# Altium PCB 388D_Control_v1_PCB1.PcbDoc (part 6 of 7)
Units mil, origin at the board's own origin, x right, y up, seen from the top; angles counter-clockwise.
Board outline 3431 x 3800 mil, 6 copper layers (Top Layer, Singal Layer 2, Signal layer 3, Signal Layer 4, Signal Layer 5, Bottom Layer), stack 32.7 mil thick; 270 components, 383 nets, 1462 pads, 899 vias.
Unrouted connection lines stored in the file: 19.
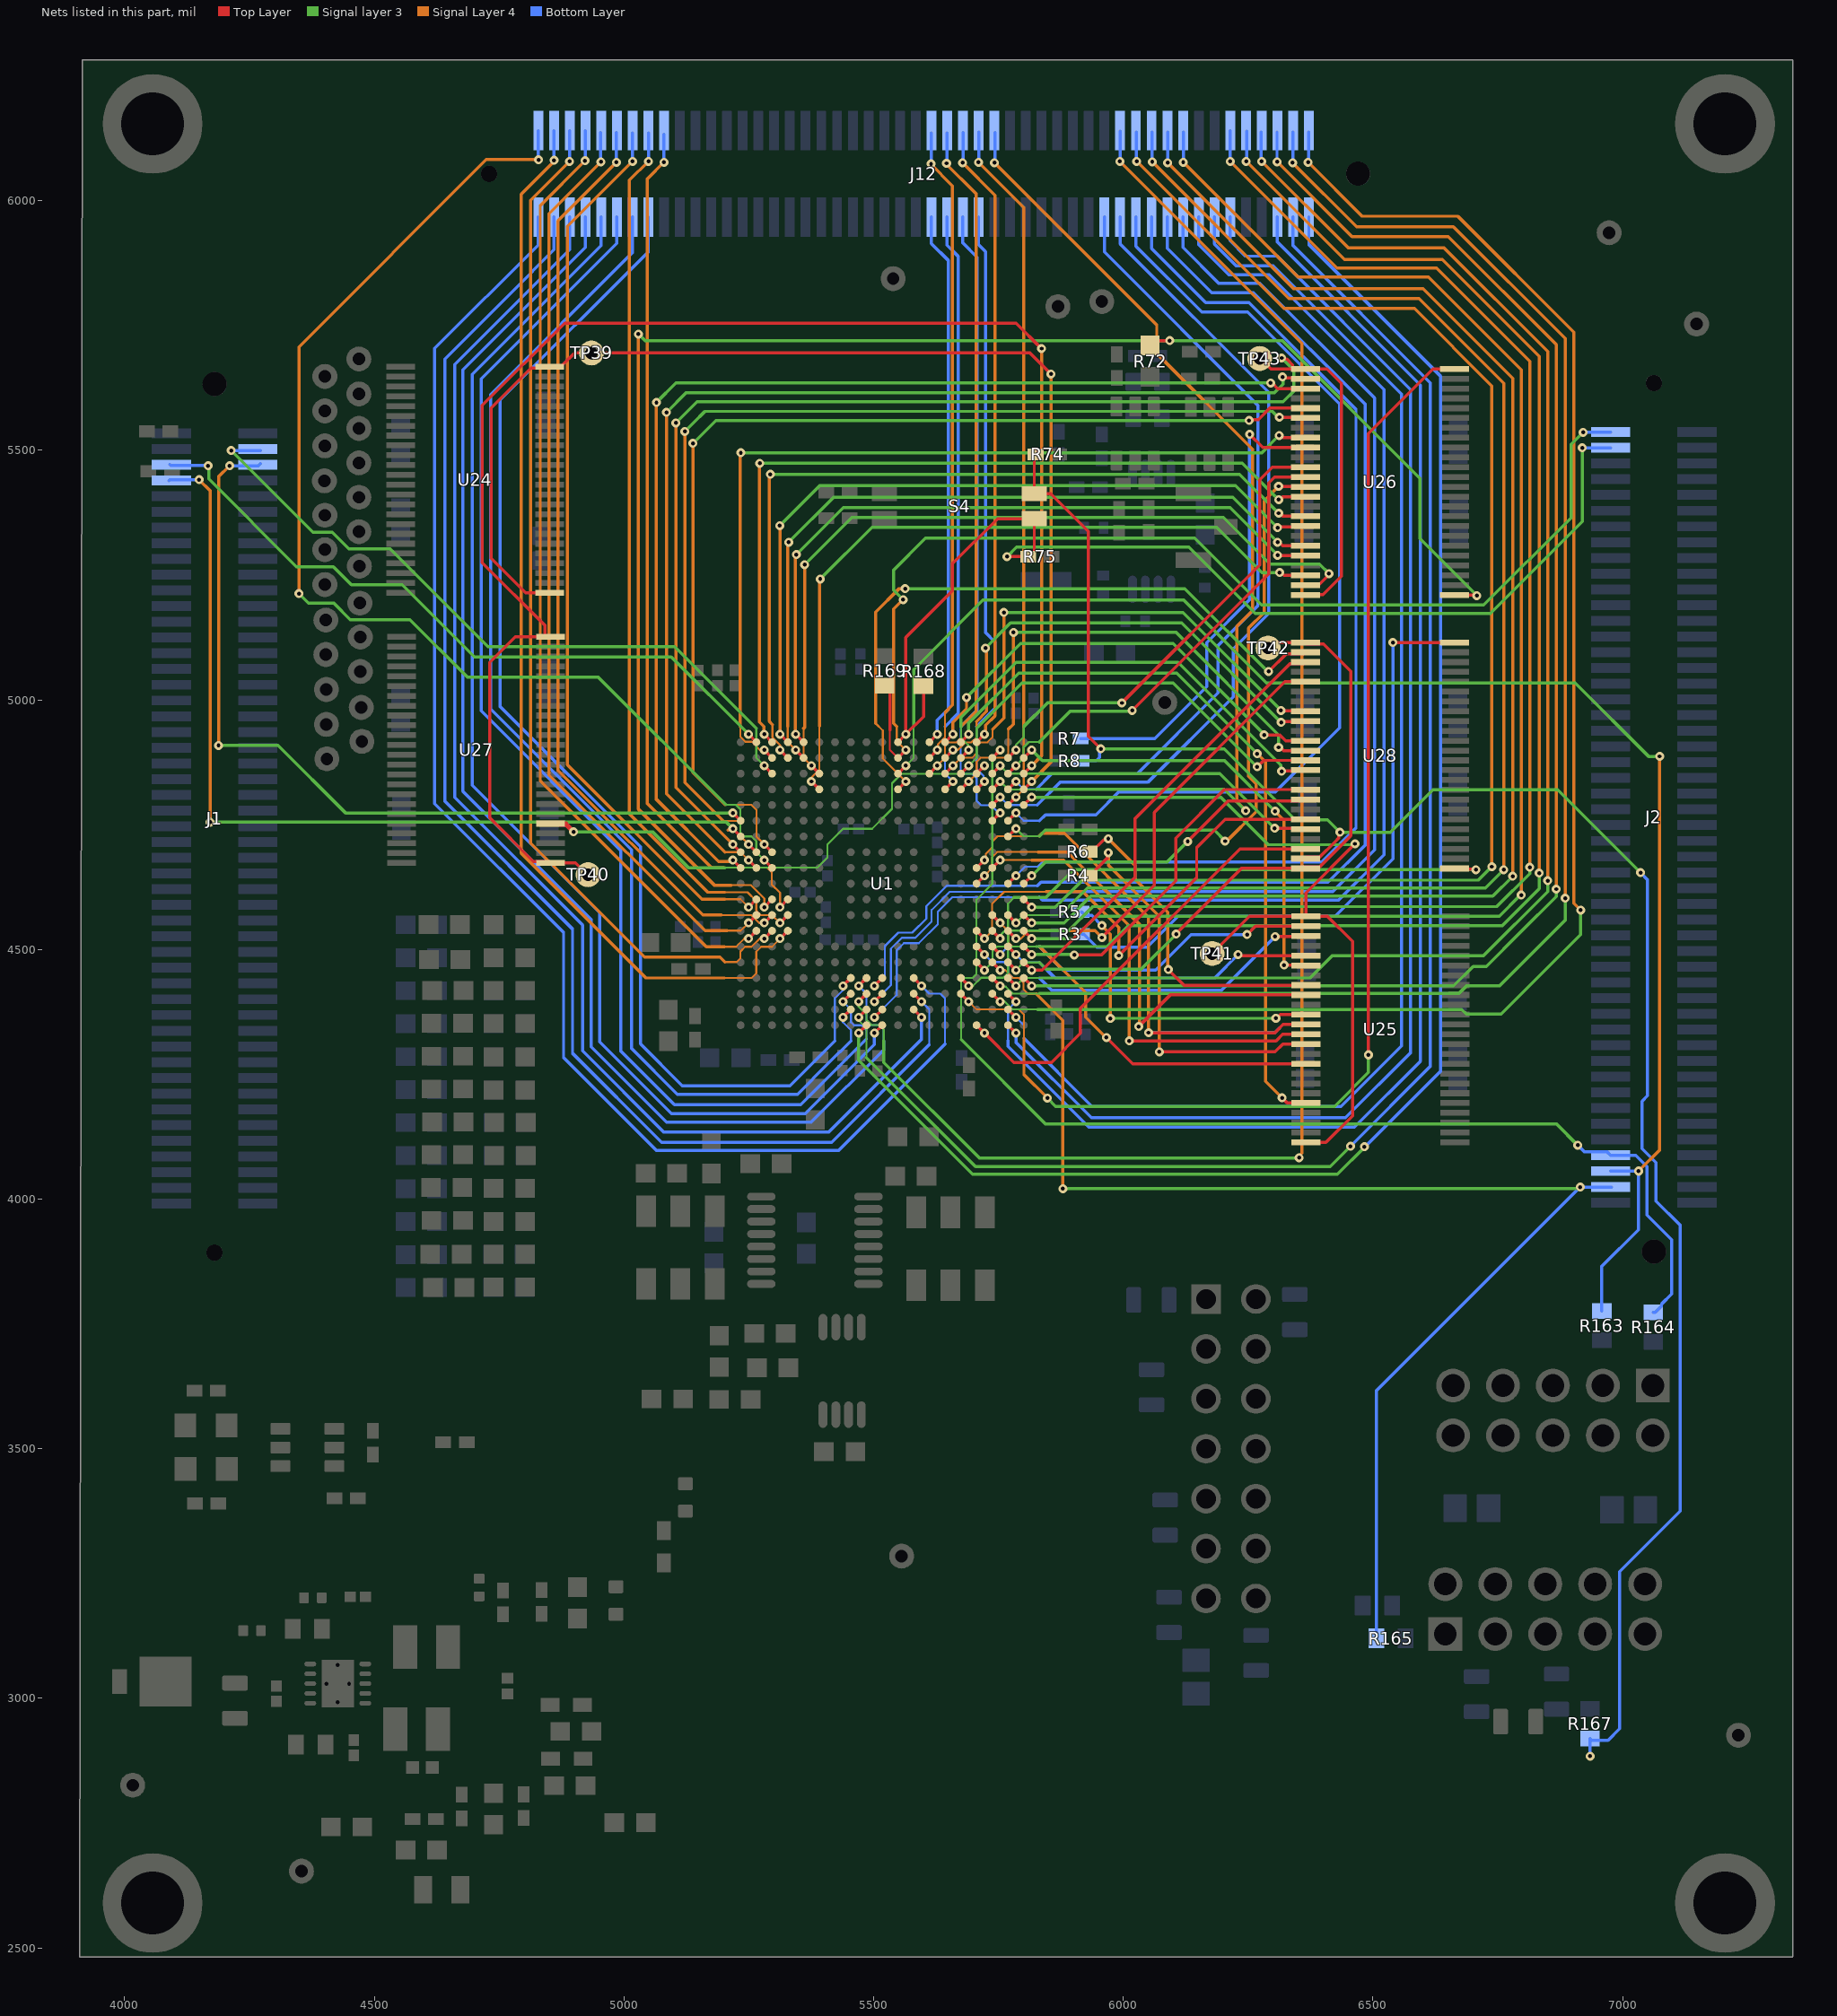
[diagram p8: the nets of this part, all layers, seen from the top]

## Via types
v1: diameter 18, hole 8, Top Layer to Bottom Layer, tented both sides, 898 vias
v2: diameter 18/18/18/18/18/18 (per signal layer), hole 8, Top Layer to Bottom Layer, tented both sides, 1 vias

## Nets (pads, with @x,y where several pads share a name; then routed paths per layer and width w, separated by ;. In a path a pad name is that pad's centre, name@x,y a point inside that pad or via, vN(x,y) a via of type N, cw(c..) or ccw(c..) an arc to the next point about the centre after c; other vN are vias at no path point) (continued)
MCU_GPIO41: J12.2 U1.U17 | length 3207.6
  Top Layer w6.25: U1.U17@5737.65,4411.52 v1(5753.4,4395.77)
  Signal layer 3 w4: v1(5753.4,4395.77) 5762.23,4395.77 5777.9,4380.1 5828.69,4380.1
  Signal layer 3 w6.25: 5828.69,4380.1 6677.9,4380.1 6687,4371 6757,4371 6916,4530 v1(6916,4579)
  Signal Layer 4 w6.25: v1(6370,6077) 6478,5969 6670,5969 6902,5737 6902,4593 v1(6916,4579)
  Bottom Layer w6.25: v1(6370,6077) 6370.83,6077.83 J12.2@6370.83,6137.61
MCU_GPIO42: TP39.1 U1.D19 U24.25 U24.48 | length 2485.7
  Top Layer w6.25: U24.25@4850.99,5214.59 4803.41,5214.59 4734,5284 4734,5585 4813.57,5664.57 4848.21,5664.57 U24.48@4850.99,5667.35 4874.12,5667.35 4876.9,5670.13 4876.9,5670.9 4901,5695 TP39.1@4935,5695 5813,5695 v1(5855,5653) ; U1.D19@5800.64,4820.97 v1(5816.39,4836.71)
  Signal Layer 4 w6.25: v1(5816.39,4836.71) 5855,4875.32 v1(5855,5653)
MCU_GPIO43: TP40.1 U1.C19 U27.25 U27.48 | length 3288.4
  Top Layer w6.25: U27.48@4841.36,5126.3 4782.3,5126.3 4731,5075 4731,4764 4818.67,4676.33 4850.2,4676.33 U27.25@4852.98,4673.54 4902.93,4673.55 4926.48,4650 TP40.1@4928,4650 ; U27.48@4852.98,5126.3 4844.14,5126.3 4841.36,5129.08 4841.36,5149.64 4716,5275 4716,5590 4881,5755 5784.97,5755 v1(5836.11,5703.86) ; U1.C19@5800.64,4852.46 v1(5816.39,4868.21)
  Signal layer 3 w6.25: v1(5836.11,5703.86) v1@5836.25,5704
  Signal Layer 4 w6.25: v1(5816.39,4868.21) 5836.11,4887.93 v1(5836.11,5703.86)
MCU_GPIO44: J12.21 U1.K18 | length 2187.1
  Top Layer w6.25: U1.K18@5769.15,4631.99 v1(5784.89,4647.74)
  Bottom Layer w4: v1(5784.89,4647.74) 5802.89,4665.74 5829.74,4665.74
  Bottom Layer w6.25: 5829.74,4665.74 5839,4675 6397,4675 6466,4744 6466,5582 6252,5796 6165,5796 6056.69,5904.31 J12.21@6056.69,5967.39
MCU_GPIO45: U1.K19 U28.41 | length 633.9
  Top Layer w6.25: U1.K19@5800.64,4631.99 v1(5816.39,4647.74) ; v1(6129,4716.5) 6168.62,4756.12 6210.5,4798 6362.67,4798 U28.41@6364.87,4800.2
  Signal layer 3 w6.25: v1(5816.39,4647.74) 5843.65,4675 6087.5,4675 v1(6129,4716.5)
MCU_GPIO46: TP41.1 U1.E19 U25.25 U25.48 | length 1691.3
  Top Layer w6.25: U1.E19@5800.64,4789.47 v1(5816.39,4805.22) ; TP41.1@6178,4492 6252.47,4566.47 U25.25@6365.74,4566.47 ; U25.48@6365.74,4113.71 6405.71,4113.71 6459,4167 6459,4516.04 6408.57,4566.47 U25.25@6365.74,4566.47 ; v1(6463.8,4711.8) 6365.74,4613.74 U25.25@6365.74,4566.47
  Signal layer 3 w6.25: v1(5816.39,4805.22) 6194.78,4805.22 6290,4710 v1@6462.92,4710
MCU_GPIO47: J12.44 U1.E18 | length 1399.1
  Top Layer w6.25: U1.E18@5769.15,4789.47 v1(5784.89,4805.22)
  Signal Layer 4 w4: v1(5784.89,4805.22) 5800.64,4820.97 5800.64,4946.95
  Signal Layer 4 w6.25: v1(5710,6077) 5800.64,5986.36 5800.64,4946.95
  Bottom Layer w6.25: v1(5710,6077) 5710.83,6077.83 J12.44@5710.83,6137.61
MCU_GPIO48: J12.12 U1.R16 | length 3070.5
  Top Layer w6.25: U1.R16@5706.15,4474.51 v1(5721.9,4458.76)
  Signal layer 3 w4: v1(5721.9,4458.76) 5738,4474.86 5738,4497 5747,4506 5761,4506 5769,4514 5769,4530 5776.74,4537.74 5832.14,4537.74
  Signal layer 3 w6.25: 5832.14,4537.74 5890.74,4537.74 5939,4586 6748,4586 6814,4652 v1(6814,4665)
  Signal Layer 4 w6.25: v1(6214,6079) 6428,5865 6627,5865 6814,5678 v1(6814,4665)
  Bottom Layer w6.25: v1(6214,6079) 6214.17,6079.17 J12.12@6214.17,6140.61
MCU_GPIO49: J2.3 R165.1 U1.R17 | length 2708.6
  Top Layer w6.25: U1.R17@5737.65,4474.51 v1(5753.4,4458.76)
  Signal layer 3 w6.25: v1(5879,4021) 6908.73,4021 6912.01,4024.28 v1(6915.19,4024.28)
  Signal Layer 4 w4: v1(5753.4,4458.76) 5763.49,4458.76 5779.15,4443.1 5791.01,4443.1 5800.01,4434.1 5800.01,4420.1 5809.01,4411.1 5826.01,4411.1
  Signal Layer 4 w6.25: 5826.01,4411.1 5879,4358.11 v1(5879,4021)
  Bottom Layer w6.25: R165.1@6506.47,3120 6506.47,3615.57 v1(6915.19,4024.28) J2.3@6977.78,4024.28
MCU_GPIO50: TP42.1 U1.R18 U28.25 U28.48 | length 1337.8
  Top Layer w6.25: U1.R18@5769.15,4474.51 v1(5784.89,4458.76) ; v1(6106,4531) 6106,4532 6236.4,4662.4 6352,4662.4 6354.78,4665.19 6393.19,4665.19 6456,4728 6456,5057 6400.62,5112.38 6367.65,5112.38 U28.25@6364.87,5115.16 6364.29,5114.58 6290.58,5114.58 6290,5114 TP42.1@6288,5114
  Signal layer 3 w4: v1(5784.89,4458.76) 5800.13,4474 5832.14,4474
  Signal layer 3 w6.25: 5832.14,4474 5845.14,4461 6036,4461 v1(6106,4531)
MCU_GPIO51: U1.R19 U28.27 | length 895.5
  Top Layer w6.25: U1.R19@5800.64,4474.51 v1(5816.39,4458.76) 5837.76,4458.76 6023,4644 6023,4762 6334.01,5073.01 6362.09,5073.01 U28.27@6364.87,5075.79
MCU_GPIO52: U1.P16 U25.27 | length 748.4
  Top Layer w6.25: U1.P16@5706.15,4506.01 v1(5721.9,4490.26) ; v1(6304,4526) 6304.55,4526.55 6365.19,4526.55 U25.27@6365.74,4527.1
  Bottom Layer w4: v1(5721.9,4490.26) 5737.16,4475 5760,4475 5769,4466 5769,4453.26 5779.15,4443.1 5832.14,4443.1
  Bottom Layer w6.25: 5832.14,4443.1 5857.24,4418 6196,4418 v1@6303.76,4525.76
MCU_GPIO53: U1.P17 U25.26 | length 699.7
  Top Layer w6.25: U1.P17@5737.65,4506.01 v1(5753.4,4490.26) ; v1@6246.8,4528.8 v1(6248,4530) 6264.78,4546.78 U25.26@6365.74,4546.78
  Bottom Layer w4: v1(5753.4,4490.26) 5769.14,4506 5832.14,4506
  Bottom Layer w6.25: 5832.14,4506 5879.14,4459 6065,4459 6136,4530 v1(6248,4530) v1@6249,4530
MCU_GPIO54: U1.P18 U25.29 | length 643
  Top Layer w6.25: U1.P18@5769.15,4506.01 v1(5784.89,4490.26) ; v1(6230,4490) 6232.25,4487.75 6238.43,4487.75 U25.29@6365.74,4487.73
  Bottom Layer w4: v1(5784.89,4490.26) 5801.15,4474 5832.14,4474
  Bottom Layer w6.25: 5832.14,4474 5863.03,4443.1 6183.1,4443.1 v1(6230,4490)
MCU_GPIO55: U1.P19 U28.40 | length 758.4
  Top Layer w6.25: U1.P19@5800.64,4506.01 v1(5816.39,4490.26) ; v1(5902,4489) 5956,4489 6105,4638 6105,4723 6202.54,4820.54 U28.40@6364.87,4820.54
  Signal layer 3 w6.25: v1(5816.39,4490.26) 5900.74,4490.26 v1(5902,4489)
MCU_GPIO56: U1.N16 U28.43 | length 970
  Top Layer w6.25: U1.N16@5706.15,4537.5 v1(5721.9,4521.75) ; v1(5991,4488) 6147,4644 6147,4704 6203.83,4760.83 U28.43@6364.87,4760.83
  Signal Layer 4 w4: v1(5721.9,4521.75) 5737.4,4537.26 5737.4,4591.74 5761.4,4615.74 5845.78,4615.74
  Signal Layer 4 w6.25: 5845.78,4615.74 5919.26,4615.74 5991,4544 v1(5991,4488)
MCU_GPIO57: U1.N18 U28.29 | length 912.2
  Top Layer w6.25: U1.N18@5769.15,4537.5 v1(5784.89,4521.75) ; v1(5957,4524) 6062,4629 6062,4774.7 6323.72,5036.42 U28.29@6364.87,5036.42
  Signal Layer 4 w4: v1(5784.89,4521.75) 5794.66,4521.75 5810.64,4537.74 5832.14,4537.74
  Signal Layer 4 w6.25: 5832.14,4537.74 5943.26,4537.74 v1(5957,4524)
MCU_GPIO58: U1.N17 U28.1 | length 1108
  Top Layer w6.25: U1.N17@5737.65,4537.5 v1(5753.4,4521.75) ; U28.1@6663.14,4662.4 6664.44,4661.11 6704.7,4661.11 v1(6706,4659.81)
  Signal layer 3 w4: v1(5753.4,4521.75) 5756.08,4524.43 5756.08,4531.08 5769,4544 5769,4592 5781,4604
  Signal layer 3 w6.25: 5781,4604 5844.38,4604 5900.19,4659.81 v1(6706,4659.81)
MCU_GPIO59: R3.1 U28.24 | length 1263.2
  Top Layer w6.25: v1(6540,5115) 6540.08,5115.08 6663.06,5115.08 U28.24@6663.14,5115.16
  Bottom Layer w6.25: R3.1@5917.03,4530.74 5920.96,4530.74 5946.7,4505 6048,4505 6109.47,4566.47 6424.47,4566.47 6540,4682 v1(6540,5115)
MCU_GPIO60: U1.M17 U25.40 | length 793.4
  Top Layer w6.25: U1.M17@5737.65,4569 v1(5753.4,4553.25) ; v1(5966,4324) 6018.81,4271.19 U25.40@6365.74,4271.19
  Signal Layer 4 w4: v1(5753.4,4553.25) 5769,4537.65 5769,4515.09 5778.09,4506 5832.14,4506
  Signal Layer 4 w6.25: 5832.14,4506 5924.43,4413.7 5924.43,4364.57 5965,4324 v1(5966,4324)
MCU_GPIO61: R4.1 U25.38 | length 805.5
  Top Layer w6.25: R4.1@5932.62,4648 5936.56,4648 5945.25,4656.69 5945.25,4660.62 5967.75,4683.13 5967.75,4691.75 v1(5970,4694) ; v1(6072,4295) 6304,4295 6319.56,4310.56 U25.38@6365.74,4310.56
  Signal layer 3 w6.25: v1(6072,4295) v1@6072.21,4295.21
  Signal Layer 4 w6.25: v1(5970,4694) 5970,4669 6072,4567 v1(6072,4295)
MCU_GPIO62: U1.J17 U25.37 | length 925.9
  Top Layer w6.25: U1.J17@5737.65,4663.48 v1(5753.4,4679.23) ; v1(6012,4317) 6306,4317 6319.25,4330.25 U25.37@6365.74,4330.25
  Signal layer 3 w6.25: v1(6012,4317) v1@6012.32,4317.32
  Signal Layer 4 w4: v1(5753.4,4679.23) 5816.9,4679.23
  Signal Layer 4 w6.25: 5816.9,4679.23 5880.77,4679.23 6012,4548 v1(6012,4317)
MCU_GPIO63: U1.J16 U25.36 | length 1274.6
  Top Layer w6.25: U1.J16@5706.15,4663.48 v1(5721.9,4679.23) ; v1(6050.55,4333.45) 6303.46,4333.45 6319.95,4349.93 U25.36@6365.74,4349.93
  Signal Layer 4 w4: v1(5721.9,4679.23) 5724.58,4681.91 5724.58,4691.58 5738,4705 5738,4717 5748,4727 5831,4727 5831.1,4727.1
  Signal Layer 4 w6.25: 5831.1,4727.1 5836.86,4732.86 5882.14,4732.86 6050.54,4564.46 v1@6050.54,4333.46
  Bottom Layer w6.25: v1(6050.55,4333.45) 6303.46,4333.45 6312.01,4342 6313,4342
MCU_GPIO64: R5.1 U25.35 | length 640.4
  Top Layer w6.25: v1(6305.59,4362.5) 6307.18,4362.5 6314.3,4369.62 U25.35@6365.74,4369.62
  Signal layer 3 w6.25: v1(5974,4362) 5974.25,4362.25 6305.34,4362.25 v1(6305.59,4362.5)
  Signal Layer 4 w6.25: v1(5957,4548) 5974,4531 v1(5974,4362)
  Bottom Layer w6.25: R5.1@5916.03,4575.74 5923.57,4568.2 5936.8,4568.2 v1(5957,4548)
MCU_GPIO65: U1.K16 U25.33 | length 991.2
  Top Layer w6.25: U1.K16@5706.15,4631.99 v1(5721.9,4647.74) ; v1(6031,4346) 6093.99,4408.99 U25.33@6365.74,4408.99
  Signal Layer 4 w4: v1(5721.9,4647.74) 5737,4662.84 5737,4685 5747.42,4695.42 5829.42,4695.42
  Signal Layer 4 w6.25: 5829.42,4695.42 5887.58,4695.42 6032,4551 6032,4347 v1(6031,4346)
MCU_GPIO66: R6.1 U25.32 | length 648.5
  Top Layer w6.25: R6.1@5932.63,4696.1 5936.57,4696.1 5960.22,4719.75 5967.75,4719.75 v1(5970,4722) ; v1(6090,4460) 6121.33,4428.67 U25.32@6365.74,4428.67
  Signal Layer 4 w6.25: v1(5970,4722) 6023,4669 6023,4641 6089,4575 6089,4461 v1(6090,4460)
MCU_GPIO67: U1.B19 U25.30 | length 920.3
  Top Layer w6.25: U1.B19@5800.64,4883.96 v1(5816.39,4899.7) ; v1(6322,4469) 6322.48,4468.52 6365.26,4468.52 U25.30@6365.74,4468.04
  Signal layer 3 w6.25: v1(5816.39,4899.7) 5837.89,4878.2 6202.8,4878.2 v1(6304,4777)
  Signal Layer 4 w6.25: v1(6304,4777) 6322,4759 v1(6322,4469)
MCU_GPIO68: U1.C18 U26.36 | length 961.7
  Top Layer w6.25: U1.C18@5769.15,4852.46 v1(5784.89,4868.21) ; v1(6018,4979) 6291,5252 6291,5435 6302.62,5446.62 U26.36@6364.87,5446.62
  Signal layer 3 w4: v1(5784.89,4868.21) 5800,4883.32 5800,4905 5810.74,4915.74 5832.14,4915.74
  Signal layer 3 w6.25: 5832.14,4915.74 5894.16,4977.76 6016.76,4977.76 v1(6018,4979)
MCU_GPIO69: U1.B18 U26.35 | length 954.5
  Top Layer w6.25: U1.B18@5769.15,4883.96 v1(5784.89,4899.7) ; v1(5997,4994) 6273,5270 6273,5441 6298.31,5466.31 U26.35@6364.87,5466.31
  Signal layer 3 w4: v1(5784.89,4899.7) 5784.89,4909.89 5800.64,4925.64 5800.64,4946.48
  Signal layer 3 w6.25: 5801.11,4947.2 5847.91,4994 v1(5997,4994)
MCU_GPIO70: R7.1 U26.33 | length 958
  Top Layer w6.25: v1(6253,5532) 6279.32,5505.68 U26.33@6364.87,5505.68
  Bottom Layer w6.25: R7.1@5915.03,4922.74 6062.74,4922.74 6167,5027 6167,5115 6253,5201 v1@6253,5531.46
MCU_GPIO71: J2.7 R164.1 U1.B17 | length 2452.7
  Top Layer w6.25: U1.B17@5737.65,4883.96 v1(5753.4,4899.7)
  Signal layer 3 w4: 5675.4,4319.59 5675.4,4436.4 5682,4443 5698,4443 5706,4451 5706,4600 5737.79,4631.79 5737.79,4884.1 v1(5753.4,4899.7)
  Signal layer 3 w6.25: 5675.4,4319.59 5844,4151 6867,4151 v1(6910,4108)
  Bottom Layer w6.25: v1(6910,4108) 6923.54,4094.46 6969.29,4094.46 J2.7@6976.01,4087.74 7026.26,4087.74 7049,4065 7049,3968 7098,3919 7098,3809.77 7077.96,3789.72 7077.96,3785.79 7065.33,3773.16 R164.1@7061.4,3773.16
MCU_GPIO72: R8.1 R74.2 R167.1 S4.2 U28.47 | length 3986.9
  Top Layer w6.25: R74.2@5824.39,5492.1 5821.69,5489.41 S4.2@5821.69,5413.21 5854.79,5413.21 5930,5338 5930,4927 v1(5955,4902) ; U28.47@6364.87,4682.09 6367.65,4684.87 6392.99,4684.87 6423.36,4715.24 6431.81,4723.7 6431.81,4732.81 v1(6434,4735)
  Signal layer 3 w6.25: v1(5955,4902) 6202.25,4902 6344.25,4760 6409,4760 v1(6434,4735) 6535,4735 6619.89,4819.89 6870.23,4819.89 7036,4654.11 v1(7036,4654)
  Bottom Layer w6.25: R8.1@5916.03,4877.74 5916.6,4878.31 5946.31,4878.31 5952.75,4884.75 5952.75,4899.75 v1(5955,4902) ; v1(6934.69,2884.39) R167.1@6934.69,2919.82 6938.5,2916.01 6971.01,2916.01 6994,2939 6994,3254 7115,3375 7115,3948 7067,3996 7067,4073 7039,4101 7039,4196 7050,4207 7050,4640 v1(7036,4654)
MCU_GPIO73: J12.46 U1.A16 | length 1263.7
  Top Layer w6.25: U1.A16@5706.15,4915.45 v1(5721.9,4931.2)
  Signal Layer 4 w6.25: v1(5678,6076) 5743,6011 5743,4968 5724.15,4949.15 5724.15,4933.45 v1(5721.9,4931.2)
  Bottom Layer w6.25: v1(5678,6076) 5678.83,6076.83 J12.46@5678.83,6136.61
MCU_GPIO74: U1.C17 U28.44 | length 687.2
  Top Layer w6.25: U1.C17@5737.65,4852.46 v1(5753.4,4868.21) ; v1@6302,4742.57 6363.45,4742.57 U28.44@6364.87,4741.15
  Signal layer 3 w4: v1(5753.4,4868.21) 5769.15,4852.46 5832.14,4852.46
  Signal layer 3 w6.25: 5832.14,4852.46 6193.54,4852.46 v1(6303,4743)
MCU_GPIO75: J12.43 U1.D16 | length 1188.3
  Top Layer w6.25: U1.D16@5706.15,4820.97 v1(5721.9,4836.71)
  Bottom Layer w4: 5706.15,4946.95 5706.15,4861.96 5720.04,4848.07 5720.04,4838.57 v1(5721.9,4836.71)
  Bottom Layer w6.25: 5706.15,4946.95 5743.01,4983.8 5743.01,5115.99 5724,5135 5724,5898 5710.24,5911.76 J12.43@5710.24,5967.39
MCU_GPIO76: U1.C16 U27.29 | length 1057.4
  Top Layer w6.25: U1.C16@5706.15,4852.46 v1(5721.9,4868.21)
  Top Layer w10: U27.29@4852.98,4752.28 4853.89,4751.38 4883.62,4751.38 v1(4899,4736)
  Signal layer 3 w4: 5202.22,4664.1 5387.12,4664.1 5407.41,4684.39 5407.41,4710.4 5438.9,4741.89 5496.89,4741.89 5537,4782 5537,4833 5556,4852 5705.69,4852 v1(5721.9,4868.21)
  Signal layer 3 w6.25: v1(4899,4736) 5057,4736 5128.9,4664.1 5202.22,4664.1
MCU_GPIO77: U1.A15 U25.44 | length 1497.7
  Top Layer w6.25: U1.A15@5674.66,4915.45 v1(5690.4,4931.2) ; v1(6318,4203) 6328.55,4192.45 U25.44@6365.74,4192.45
  Signal layer 3 w6.25: v1(5690.4,4931.2) 5690.4,4953.74 5790.66,5054 6107,5054 6268,4893 v1(6268,4892)
  Signal Layer 4 w6.25: v1(6268,4892) 6269,4892 6285,4876 6285,4236 v1(6318,4203) v1@6319.59,4201.41 ; v1@6318.54,4198.97 v1@6318.54,4200.36
MCU_GPIO78: U1.B15 U28.38 | length 925.1
  Top Layer w6.25: U1.B15@5674.66,4883.96 v1(5690.4,4899.7) ; v1(6317,4857) 6318.13,4858.13 6361.24,4858.13 U28.38@6362.74,4859.63
  Signal layer 3 w4: 5675.01,4946.1 5675.01,4924.1 5689.01,4910.1 5689.01,4901.1 v1(5690.4,4899.7)
  Signal layer 3 w6.25: 5675.01,4946.1 5675.01,4965.01 5785,5075 6110,5075 6315.76,4869.24 6315.76,4858.24 v1(6317,4857)
MCU_GPIO79: U1.C15 U28.37 | length 874.7
  Top Layer w6.25: U1.C15@5674.66,4852.46 v1(5690.4,4868.21) ; v1(6268,4866) 6268.1,4866 6281.05,4878.94 U28.37@6364.87,4878.94
  Signal layer 3 w4: v1(5690.4,4868.21) 5706.01,4883.81 5706.01,4944.1
  Signal layer 3 w6.25: 5707.01,4944.1 5796.91,5034 6100,5034 v1(6268,4866)
MCU_GPIO80: U1.D15 U28.36 | length 1083.2
  Top Layer w6.25: U1.D15@5674.66,4820.97 v1(5690.4,4836.71) ; v1(6311,4905) 6314.18,4905 6320.55,4898.62 U28.36@6364.73,4898.62
  Signal layer 3 w6.25: v1(5780.01,5135.1) 6105.9,5135.1 6311,4930 v1(6311,4905)
  Signal Layer 4 w4: v1(5690.4,4836.71) 5706.15,4852.46 5706.15,4876.25 5714.01,4884.1 5762.01,4884.1 5769.62,4891.71 5769.62,4941.2
  Signal Layer 4 w6.25: 5769.62,4941.2 5780.01,4951.59 v1(5780.01,5135.1)
MCU_GPIO81: U1.A14 U28.35 | length 914.2
  Top Layer w6.25: U1.A14@5643.16,4915.45 v1(5658.91,4931.2) ; v1(6282,4930) 6313.29,4930 6325.08,4918.21 U28.35@6366.8,4918.21
  Signal layer 3 w6.25: v1(5686,5005) 5794.1,5113.1 6099.9,5113.1 6282,4931 v1(6282,4930)
  Signal Layer 4 w6.25: v1(5658.91,4931.2) 5658.91,4955 5686.01,4982.1 v1(5686,5005)
MCU_GPIO82: U1.B14 U28.33 | length 1007
  Top Layer w6.25: U1.B14@5643.16,4883.96 v1(5658.91,4899.7) ; v1(6316,4955) 6317.34,4956.34 6357.78,4956.34 U28.33@6359.12,4957.68
  Signal layer 3 w6.25: v1(5724,5104) 5774.1,5154.1 6116.9,5154.1 v1@6315.76,4955.24
  Signal Layer 4 w4: v1(5658.91,4899.7) 5668.61,4899.7 5684.01,4915.1 5696.01,4915.1 5706.01,4925.1 5706.01,4957.01
  Signal Layer 4 w6.25: 5706.01,4957.01 5726.01,4977.01 5726.01,5101.99 v1(5724,5104)
MCU_GPIO83: U1.C14 U28.32 | length 1076.9
  Top Layer w6.25: U1.C14@5643.16,4852.46 v1(5658.91,4868.21) ; v1(6315.85,4978.85) 6316.59,4978.11 6363.37,4978.11 U28.32@6364.11,4977.36
  Signal layer 3 w6.25: v1(5761.01,5175.1) 6119.6,5175.1 v1(6315.85,4978.85)
  Signal Layer 4 w4: v1(5658.91,4868.21) 5674.8,4884.1 5697.01,4884.1 5706.15,4893.25 5706.15,4906.25 5715.01,4915.1 5728.01,4915.1 5738,4925.09 5738,4941.41
  Signal Layer 4 w6.25: 5738.41,4941.41 5761.01,4964.01 v1(5761.01,5175.1)
MCU_GPIO84: J2.97 R75.1 R168.1 S4.1 U1.A11 | length 2333.8
  Top Layer w6.25: U1.A11@5548.67,4915.45 v1(5564.42,4931.2) ; R168.1@5600.01,5030.23 R168.1@5600.01,5027.57 5600.01,4966.79 v1(5564.42,4931.2) ; v1(5767,5287) R75.1@5809.38,5287 ; R75.1@5821.69,5288.65 S4.1@5821.69,5363.21 5748.21,5363.21 5658.01,5273.01 5658.01,5218.69 5564.42,5125.1 v1(5564.42,4931.2)
  Signal layer 3 w6.25: v1(5767,5287) 5786,5306 6131,5306 6264,5173 6735,5173 6919.31,5357.31 v1(6919.31,5505)
  Signal Layer 4 w6.25: v1(5564.42,4931.2) v1@5564.42,4934.38
  Bottom Layer w6.25: v1(6919.31,5505) 6975.95,5505 J2.97@6976.01,5505.06
MCU_GPIO85: J2.99 R169.1 U1.B11 | length 2320.6
  Top Layer w4: 5532.4,4939.35 5532.4,4900.23 U1.B11@5548.67,4883.96
  Top Layer w6.25: 5532.4,4939.35 R169.1@5532.4,5041.74 ; U1.B11@5548.67,4883.96 v1(5564.42,4899.7)
  Signal layer 3 w6.25: v1(5559,5201) 5540,5220 5540,5260 5604,5324 6143,5324 6277,5190 6722,5190 6897,5365 6897,5512 v1(6921,5536)
  Signal Layer 4 w4: 5546.4,4946.95 5546.4,4917.72 v1(5564.42,4899.7)
  Signal Layer 4 w6.25: 5546.4,4946.95 5540.01,4953.35 5540.01,5182.01 v1(5559,5201)
  Bottom Layer w6.25: v1(6921,5536) 6975.45,5536 J2.99@6976.01,5536.56
MCU_GPIO86: J2.5 R163.1 U1.C11 | length 3117.4
  Top Layer w6.25: U1.C11@5548.67,4852.46 v1(5564.42,4868.21)
  Signal layer 3 w4: v1(5564.42,4868.21) 5580.17,4883.96 5580.17,4946.95
  Signal layer 3 w6.25: 5580.17,4946.95 5580.17,5061.17 5719,5200 6121,5200 6287,5034 6905,5034 7052,4887 v1(7074,4887)
  Signal Layer 4 w6.25: v1@7032,4056 7074,4098 v1(7074,4887)
  Bottom Layer w6.25: R163.1@6958.4,3776.16 6958.4,3865.4 7031.76,3938.76 v1(7031.76,4056.24) J2.5@6976.01,4056.24
MCU_GPIO87: U1.D11 U28.26 | length 1350.8
  Top Layer w6.25: U1.D11@5548.67,4820.97 v1(5564.42,4836.71) ; v1(6291,5057) 6326.69,5092.69 6361.95,5092.69 U28.26@6364.42,5095.17
  Signal layer 3 w6.25: v1(5563,5223) 6123,5223 6289,5057 v1(6291,5057)
  Signal Layer 4 w4: 5504.29,4952.82 5518.4,4938.7 5518.4,4882.73 v1(5564.42,4836.71)
  Signal Layer 4 w6.25: 5504.29,4952.82 5504.29,5176.29 5550.26,5222.26 5562.26,5222.26 v1(5563,5223)
MCU_GPIO88: U1.C6 U26.47 | length 1598.5
  Top Layer w6.25: v1(5375.44,4868.21) U1.C6@5391.19,4852.46 ; U26.47@6392,5231 6409.75,5248.75 6409.75,5250.75 v1(6412,5253)
  Signal layer 3 w6.25: v1(5362,5271) 5456.47,5365.47 6200.53,5365.47 6294,5272 6393,5272 v1(6412,5253)
  Signal Layer 4 w4: 5359.7,4942.79 5359.7,4883.96 v1(5375.44,4868.21)
  Signal Layer 4 w6.25: 5359.7,4942.79 5362,4945.09 v1(5362,5271)
MCU_GPIO89: U1.D6 U26.46 | length 1490.1
  Top Layer w6.25: v1(5375.44,4836.71) U1.D6@5391.19,4820.97 ; v1(6313.01,5255.1) 6316.19,5255.1 6321.51,5249.77 U26.46@6364.87,5249.77 U26.46@6365.46,5249.77
  Signal layer 3 w6.25: v1(5393.01,5242.1) 5496.69,5345.78 6187.22,5345.78 6277.9,5255.1 v1(6313.01,5255.1)
  Signal Layer 4 w4: v1(5375.44,4836.71) 5375.44,4844.78 5391.4,4860.74 5391.4,4946.95 5391.4,4948.1
  Signal Layer 4 w6.25: 5391.4,4948.1 5391.4,5240.5 v1(5393.01,5242.1)
MCU_GPIO90: U1.A5 U26.44 | length 1482.9
  Top Layer w6.25: v1(5343.95,4931.2) U1.A5@5359.7,4915.45 ; v1(6309,5290) 6309.43,5289.57 6365.04,5289.57 U26.44@6365.46,5289.15
  Signal layer 3 w6.25: v1@5341.7,4933.45 v1(5343.95,4931.2) ; v1(5345,5291) 5439,5385 6214,5385 v1(6309,5290)
  Signal Layer 4 w6.25: v1@5343.02,4933.45 5343.02,5289.02 v1(5345,5291)
MCU_GPIO91: U1.B5 U26.43 | length 1558.3
  Top Layer w6.25: v1(5343.95,4899.7) U1.B5@5359.7,4883.96 ; v1(6309,5316) 6312.18,5316 6319.35,5308.83 U26.43@6364.87,5308.83
  Signal layer 3 w6.25: v1(5330,5316) 5419.9,5405.9 6219.1,5405.9 v1(6309,5316)
  Signal Layer 4 w4: 5328.01,4946.95 5328.01,4915.65 v1(5343.95,4899.7)
  Signal Layer 4 w6.25: 5328.01,4946.95 5328.01,5314.01 v1(5330,5316)
MCU_GPIO92: U1.A4 U26.41 | length 1563.1
  Top Layer w6.25: v1(5312.45,4931.2) U1.A4@5328.2,4915.45 ; v1(6309,5345) 6310.6,5346.6 6363.86,5346.6 U26.41@6365.46,5348.2
  Signal layer 3 w6.25: v1(5312,5349) 5392.1,5429.1 6224.9,5429.1 v1(6309,5345)
  Signal Layer 4 w6.25: v1(5312,5349) 5312.45,5348.55 v1(5312.45,4931.2)
MCU_GPIO93: U1.B4 U26.40 | length 1691.7
  Top Layer w6.25: v1(5312.45,4899.7) U1.B4@5328.2,4883.96 ; v1(6311.01,5374.1) 6314.19,5374.1 6320.4,5367.89 U26.40@6364.87,5367.89 U26.40@6365.46,5367.89
  Signal layer 3 w6.25: v1(5293.01,5452.1) 6233.01,5452.1 v1(6311.01,5374.1)
  Signal Layer 4 w4: 5297.4,4950.72 5297.4,4924.7 5312.45,4909.66 v1(5312.45,4899.7)
  Signal Layer 4 w6.25: v1(5293.01,5452.1) 5291.01,5450.1 5291.01,4957.12 5297.4,4950.72
MCU_GPIO94: U1.A3 U26.38 | length 1695.9
  Top Layer w6.25: v1(5280.96,4931.2) U1.A3@5296.7,4915.45 ; v1(6311.01,5401.1) 6314.19,5401.1 6320.34,5407.26 U26.38@6364.87,5407.26 U26.38@6365.46,5407.26
  Signal layer 3 w6.25: v1(5272.01,5474.1) 6238.01,5474.1 v1(6311.01,5401.1)
  Signal Layer 4 w6.25: v1(5272.01,5474.1) 5271.01,5473.1 5271.01,4956.13 5280.19,4946.95 5280.19,4931.97 v1(5280.96,4931.2)
MCU_GPIO95: U1.B3 U26.32 | length 1798.2
  Top Layer w6.25: v1(5280.96,4899.7) U1.B3@5296.7,4883.96 ; v1(6312.01,5529.78) 6315.19,5529.78 6319.61,5525.36 U26.32@6364.87,5525.36 U26.32@6365.46,5525.36
  Signal layer 3 w6.25: v1(5234.01,5495.1) 6277.33,5495.1 v1(6312.01,5529.78)
  Signal Layer 4 w4: 5233.01,4946.95 5233.01,4926.1 5243.01,4916.1 5256.01,4916.1 5272.4,4899.7 v1(5280.96,4899.7)
  Signal Layer 4 w6.25: 5233.01,4946.95 5233.01,5494.1 v1(5234.01,5495.1)
MCU_GPIO96: J1.3 U1.C3 | length 1444.5
  Top Layer w6.25: v1(5280.96,4868.21) U1.C3@5296.7,4852.46
  Signal layer 3 w4: 5265.01,4943.1 5265.01,4884.16 v1(5280.96,4868.21)
  Signal layer 3 w6.25: v1(4213.51,5499.6) 4377.11,5336 4416,5336 4449,5303 4531.8,5303 4727.8,5107 5101.11,5107 5265.01,4943.1
  Bottom Layer w6.25: v1(4213.51,5499.6) J1.3@4272.19,5499.6
MCU_GPIO97: J1.6 U1.A2 | length 1419.5
  Top Layer w6.25: v1(5249.46,4931.2) U1.A2@5265.21,4915.45
  Signal layer 3 w6.25: v1(4167,5469) 4168.5,5467.5 4168.5,5442.5 4344,5267 4418,5267 4454,5231 4555.99,5231 4700.97,5086.02 5094.65,5086.02 v1(5249.46,4931.2)
  Bottom Layer w6.25: J1.6@4090.71,5471.62 4092.23,5470.1 4165.9,5470.1 v1(4167,5469)
MCU_GPIO98: J1.5 U1.F1 | length 1740.8
  Top Layer w6.25: v1(5217.97,4773.72) U1.F1@5233.71,4757.97
  Signal layer 3 w6.25: v1(4188,4909) 4307,4909 4442.28,4773.72 v1(5217.97,4773.72)
  Signal Layer 4 w6.25: v1(4188,4909) 4188,5447 v1(4210,5469)
  Bottom Layer w6.25: v1(4210,5469) 4267.59,5469 J1.5@4271.69,5473.1
MCU_GPIO99: J1.8 U1.G1 | length 1842
  Top Layer w6.25: v1(5217.97,4742.23) U1.G1@5233.71,4726.48
  Signal layer 3 w6.25: v1(4171,4755) 5205.19,4755 v1(5217.97,4742.23)
  Signal Layer 4 w6.25: v1(4149.01,5441.1) 4171,5419.11 v1(4171,4755) ; 5208.43,4739.33 5209.08,4739.98 5215.72,4739.98 v1(5217.97,4742.23)
  Bottom Layer w6.25: J1.8@4088.32,5439.1 4090.32,5441.1 v1(4149.01,5441.1)
MCU_GPIO100: TP43.1 U1.H1 U26.25 U26.48 | length 2962.4
  Top Layer w6.25: v1(5217.97,4710.73) U1.H1@5233.71,4694.98 ; TP43.1@6259.27,5683 TP43.1@6274.03,5683 ; TP43.1@6273.27,5684 6275.03,5684 6295.87,5663.16 U26.25@6338.96,5663.16 ; v1(6317,5685) 6319.25,5682.75 6327.62,5682.75 6338.96,5671.41 6338.96,5665.94 6341.74,5663.16 U26.25@6364.87,5663.16 6365.01,5663.29 6407.71,5663.29 6437,5634 6437,5248 6399.86,5210.86 U26.48@6365.33,5210.86
  Top Layer w10: U26.48@6364.87,5210.4 6365.33,5210.86 U26.48@6365.78,5211.31
  Signal layer 3 w6.25: v1(5104,5555) 5146.1,5597.1 6320,5597.1 6341.94,5619.04 6341.94,5660.06 v1(6317,5685)
  Signal Layer 4 w6.25: v1(5104,5555) 5104,4824.69 v1(5217.97,4710.73)
MCU_GPIO101: U1.H2 U26.30 | length 2184.5
  Top Layer w6.25: v1(5249.46,4710.73) U1.H2@5265.21,4694.98 ; v1(6312.57,5566.43) 6313.42,5565.58 6364.02,5565.58 U26.30@6364.87,5564.73
  Signal layer 3 w6.25: v1(5122,5538) 5139.13,5555.13 5162.1,5578.1 6298.25,5578.1 6309.92,5566.43 v1(6312.57,5566.43)
  Signal Layer 4 w4: 5198.3,4757.74 5227.37,4757.74 5233.01,4752.1 5233.01,4727.18 v1(5249.46,4710.73)
  Signal Layer 4 w6.25: v1(5122,5538) 5121.88,5537.88 5121.88,4834.15 5198.3,4757.74
MCU_GPIO102: U1.H3 U26.29 | length 2171.8
  Top Layer w6.25: v1(5280.96,4710.73) U1.H3@5296.7,4694.98 ; v1(6252,5560) 6253.47,5561.47 6270.38,5561.47 6293.33,5584.42 U26.29@6364.87,5584.42
  Signal layer 3 w6.25: v1(5138.01,5514.1) 5183.91,5560 v1(6252,5560)
  Signal Layer 4 w4: 5202.22,4790.1 5255.01,4790.1 5265.4,4779.7 5265.4,4726.28 v1(5280.96,4710.73)
  Signal Layer 4 w6.25: v1(5138.01,5514.1) 5138.01,4854.31 5202.22,4790.1
MCU_GPIO103: U1.J1 U26.27 | length 2342.8
  Top Layer w6.25: v1(5217.97,4679.23) U1.J1@5233.71,4663.48 ; v1(6295,5635) 6298.18,5635 6309.39,5623.79 U26.27@6364.87,5623.79
  Signal layer 3 w6.25: v1(5065,5596) 5104,5635 v1(6295,5635)
  Signal Layer 4 w6.25: v1(5065,5596) 5065,4800.7 5189.6,4676.1 v1@5217.97,4676.1
MCU_GPIO104: U1.J2 U26.26 | length 2329.8
  Top Layer w6.25: v1(5249.46,4679.23) U1.J2@5265.21,4663.48 ; v1(6319,5647) 6320.76,5645.24 6363.11,5645.24 U26.26@6364.87,5643.48
  Signal layer 3 w6.25: v1(5085,5576) 5124,5615 6302,5615 6319.76,5632.76 6319.76,5645.99 v1@6319.88,5646.12
  Signal Layer 4 w4: 5202.22,4695.1 5233.59,4695.1 ; 5237.33,4691.42 5233.64,4695.1 5233.59,4695.1 ; v1(5249.46,4679.23) 5233.59,4695.1
  Signal Layer 4 w6.25: v1(5085,5576) 5085,4812.32 5202.22,4695.1
MCU_GPIO105: J12.100 U1.J3 | length 2403.7
  Top Layer w6.25: v1(5280.96,4679.23) U1.J3@5296.7,4663.48
  Signal layer 3 w4: 5203.9,4790.1 5223.98,4790.1 5233.08,4781 5233.08,4773.06 5233.01,4772.99 5233.01,4734.1 5240.4,4726.71 5255.29,4726.71 5265,4717 5265,4695.19 v1(5280.96,4679.23)
  Signal layer 3 w6.25: v1(4349,5213) 4368,5194 4419,5194 4452,5161 4571,5161 4686,5046 4948,5046 5203.9,4790.1
  Signal Layer 4 w6.25: v1(4349,5213) 4349,5707 4724.33,6082.33 v1@4828.67,6082.33
  Bottom Layer w6.25: J12.100@4828.35,6140.61 4828.35,6082.65 v1(4829,6082)
MCU_GPIO106: J12.88 U1.L2 | length 1822.7
  Top Layer w6.25: v1(5249.46,4584.74) U1.L2@5265.21,4600.49
  Signal Layer 4 w4: 5202.22,4600.74 5233.47,4600.74 v1(5249.46,4584.74)
  Signal Layer 4 w6.25: v1(5017,6079) 4887,5949 4887,4870 5156.26,4600.74 5202.22,4600.74
  Bottom Layer w6.25: v1(5017,6079) J12.88@5017,6135.95
MCU_GPIO107: R72.2 U1.L3 U26.1 | length 3383.4
  Top Layer w6.25: v1(5280.96,4584.74) U1.L3@5296.7,4600.49 ; R72.2@6053.72,5710.06 6053.72,5711.05 6069.29,5726.62 6069.29,5720 v1(6093,5720) ; U26.1@6663.14,5210.4 6663.84,5209.7 6707.3,5209.7 v1(6708,5209)
  Signal layer 3 w6.25: v1(5029,5733) 5042,5720 v1(6093,5720) 6318,5720 6594,5444 6594,5323 v1(6708,5209)
  Signal Layer 4 w4: 5214.56,4629.1 5254.01,4629.1 5280.96,4602.15 v1(5280.96,4584.74)
  Signal Layer 4 w6.25: v1(5029,5733) 5029,4781 5180.9,4629.1 5214.56,4629.1
MCU_GPIO108: J12.84 U1.L4 | length 1760.2
  Top Layer w6.25: v1(5312.45,4584.74) U1.L4@5328.2,4600.49
  Signal Layer 4 w4: 5200.01,4664.1 5287.01,4664.1 5296.01,4655.1 5296.01,4630.1 5312.45,4613.66 v1(5312.45,4584.74)
  Signal Layer 4 w6.25: v1(5080,6077) 5047,6044 5047,4792.11 5175.01,4664.1 5200.01,4664.1
  Bottom Layer w6.25: v1(5080,6077) J12.84@5080,6133.45
MCU_GPIO109: J12.94 U1.N2 | length 1923.7
  Top Layer w6.25: v1(5249.46,4521.75) U1.N2@5265.21,4537.5
  Signal Layer 4 w4: 5201.64,4505.74 5224.64,4505.74 5240.66,4521.75 v1(5249.46,4521.75)
  Signal Layer 4 w6.25: v1(4922,6080) 4832.29,5990.29 4832.29,4838.26 5164.82,4505.74 5201.64,4505.74
  Bottom Layer w6.25: v1(4922,6080) 4922.83,6080.83 J12.94@4922.83,6140.61
MCU_GPIO110: J12.92 U1.M2 | length 1887.4
  Top Layer w6.25: v1(5249.46,4553.25) U1.M2@5265.21,4569
  Signal Layer 4 w4: 5206.72,4537.74 5233.95,4537.74 v1(5249.46,4553.25)
  Signal Layer 4 w6.25: v1(4954,6078) 4850,5974 4850,4850 5162.19,4537.81 5206.72,4537.81
  Bottom Layer w6.25: J12.92@4953.35,6136.61 4953.35,6078.65 v1(4954,6078)
MCU_GPIO111: J12.86 U1.M4 | length 1804.7
  Top Layer w6.25: v1(5312.45,4553.25) U1.M4@5328.2,4569
  Signal Layer 4 w4: 5202.22,4614.74 5247.37,4614.74 5265.01,4597.1 5265.01,4578.1 5274.42,4568.69 5297.01,4568.69 v1(5312.45,4553.25)
  Signal Layer 4 w6.25: v1(5049,6079) 5011,6041 5011,4772 5168.26,4614.74 5202.22,4614.74
  Bottom Layer w6.25: v1(5049,6079) J12.86@5049,6135.45
MCU_GPIO112: J12.90 U1.M3 | length 1888
  Top Layer w6.25: v1(5280.96,4553.25) U1.M3@5296.7,4569
  Signal Layer 4 w4: 5195.01,4569.1 5255.01,4569.1 5270.86,4553.25 v1(5280.96,4553.25)
  Signal Layer 4 w6.25: v1(4985,6077) 4868,5960 4868,4859 5157.9,4569.1 5195.01,4569.1
  Bottom Layer w6.25: J12.90@4984.84,6136.61 4984.84,6077.16 v1(4985,6077)
MCU_GPIO113: J12.98 U1.N4 | length 2176.8
  Top Layer w6.25: v1(5312.45,4521.75) U1.N4@5328.2,4537.5
  Signal Layer 4 w4: 5201.01,4443.1 5256.01,4443.1 5265.01,4452.1 5265.01,4495.74 5275.01,4505.74 5296.44,4505.74 v1(5312.45,4521.75)
  Signal Layer 4 w6.25: v1@4861,6080 4794,6013 4794,4693 5043.9,4443.1 5201.01,4443.1
  Bottom Layer w6.25: J12.98@4859.84,6140.61 4859.84,6081.16 v1(4860,6081)
MCU_GPIO114: J12.96 U1.N3 | length 2076.4
  Top Layer w6.25: v1(5280.96,4521.75) U1.N3@5296.7,4537.5
  Signal Layer 4 w4: 5202.22,4475.1 5226.01,4475.1 5233.01,4482.1 5233.01,4496.1 5242.64,4505.74 5255.64,4505.74 5271.66,4521.75 v1(5280.96,4521.75)
  Signal Layer 4 w6.25: v1(4891,6079) 4813,6001 4813,4713 5040.9,4485.1 5192.22,4485.1 5202.22,4475.1
  Bottom Layer w6.25: v1(4891,6079) 4891.34,6079.34 J12.96@4891.34,6140.61
MCU_GPIO115: J12.95 U1.V12 | length 2761.8
  Top Layer w6.25: U1.V12@5580.17,4380.02 v1(5595.92,4364.27)
  Bottom Layer w6.25: J12.95@4891.34,5967.39 4891.34,5902.34 4661,5672 4661,4805.11 4917,4549.11 4917,4297.11 5080.11,4134 5410,4134 5595.92,4319.92 v1(5595.92,4364.27)
MCU_GPIO116: J12.91 U1.W10 | length 2578
  Top Layer w6.25: v1(5501.43,4332.78) U1.W10@5517.18,4348.52
  Bottom Layer w6.25: J12.91@4954.33,5967.39 4954.33,5910.33 4696,5652 4696,4829 4951,4574 4951,4315 5095,4171 5363,4171 5501.43,4309.43 v1(5501.43,4332.78)
MCU_GPIO117: J12.97 U1.U12 | length 2856.1
  Top Layer w6.25: U1.U12@5580.17,4411.52 v1(5595.92,4395.77)
  Bottom Layer w4: v1(5595.92,4395.77) 5611.4,4380.28 5611.4,4309.4
  Bottom Layer w6.25: J12.97@4859.84,5967.39 4859.84,5901.84 4775,5817 4641,5683 4641,4797.11 4897,4541.11 4897,4292.11 5075.11,4114 5416,4114 5611.4,4309.4
MCU_GPIO118: J12.99 U1.T12 | length 2976.8
  Top Layer w6.25: U1.T12@5580.17,4443.01 v1(5595.92,4427.27)
  Bottom Layer w4: v1(5595.92,4427.27) 5611.44,4411.74 5633.4,4411.74 5643.03,4402.11 5643.03,4311.03
  Bottom Layer w6.25: J12.99@4828.35,5967.39 4828.35,5911.35 4621,5704 4621,4792.11 4879,4534.11 4879,4283.28 5064.28,4098 5430,4098 5643.03,4311.03
MCU_GPIO119: J12.10 U1.T15 | length 3148.3
  Top Layer w6.25: U1.T15@5674.66,4443.01 v1(5690.4,4427.27)
  Signal layer 3 w4: v1(5690.4,4427.27) 5699.27,4427.27 5715.74,4443.74 5759.64,4443.74 5769.01,4453.1 5769.01,4499.01 5776,4506 5826,4506
  Signal layer 3 w6.25: 5826,4506 5968,4506 6010,4548 6759,4548 6833,4622 v1(6833,4653)
  Signal Layer 4 w6.25: v1(6246,6079) 6443,5882 6639,5882 6833,5688 v1(6833,4653)
  Bottom Layer w6.25: v1(6246,6079) 6246.83,6079.83 J12.10@6246.83,6139.61
MCU_GPIO120: U1.U15 U26.24 | length 2514.1
  Top Layer w6.25: U1.U15@5674.66,4411.52 v1(5690.4,4395.77) ; v1(6491,4289) 6491,5533.85 6620.31,5663.16 U26.24@6663.14,5663.16
  Signal layer 3 w6.25: v1(5848,4202.41) 5864.41,4186 6423,4186 6491,4254 v1(6491,4289)
  Signal Layer 4 w4: v1(5690.4,4395.77) 5706.17,4380 5791,4380 5801.01,4369.99 5801.01,4322
  Signal Layer 4 w6.25: 5801.01,4322 5801.01,4249.4 v1(5848,4202.41)
MCU_GPIO121: U1.W16 U28.46 | length 896.1
  Top Layer w6.25: U1.W16@5706.15,4348.52 v1(5721.9,4332.78) 5780.68,4274 5856,4274 5914,4332 5914,4382 6233.77,4701.77 U28.46@6364.87,4701.77
MCU_GPIO122: J12.85 U1.T8 | length 2496.3
  Top Layer w6.25: v1(5438.44,4427.27) U1.T8@5454.19,4443.01
  Bottom Layer w4: 5422.4,4317.03 5422.4,4402.2 5438.44,4418.24 v1(5438.44,4427.27)
  Bottom Layer w6.25: J12.85@5048.82,5967.39 5048.82,5897.82 4752,5601 4752,4986.75 5033,4705.75 5033,4311 5116.9,4227.1 5332.48,4227.1 5422.4,4317.03
MCU_GPIO123: J12.89 U1.U8 | length 2616
  Top Layer w6.25: v1(5438.44,4395.77) U1.U8@5454.19,4411.52
  Bottom Layer w4: v1(5438.44,4395.77) 5454.4,4379.8 5454.4,4354.74 5460.89,4348.25 5475.89,4348.25 5485.4,4338.74 5485.4,4320.45
  Bottom Layer w6.25: J12.89@4985.83,5967.39 4985.83,5914.83 4714,5643 4714,4978 4994,4698 4994,4296 5101,4189 5353.95,4189 5485.4,4320.45
MCU_GPIO124: J12.87 U1.V8 | length 2497.9
  Top Layer w6.25: v1(5438.44,4364.27) U1.V8@5454.19,4380.02
  Bottom Layer w4: v1(5438.44,4364.27) 5438.44,4354.37 5454.4,4338.4 5454.4,4317.03
  Bottom Layer w6.25: J12.87@5017.32,5967.39 5017.32,5896.32 4733,5612 4733,4982 5015,4700 5015,4302 5106.9,4210.1 5347.48,4210.1 5408.06,4270.68 5454.4,4317.03
MCU_GPIO125: J12.93 U1.T9 | length 2759.3
  Top Layer w6.25: v1(5469.93,4427.27) U1.T9@5485.68,4443.01
  Bottom Layer w4: v1(5469.93,4427.27) 5485.4,4411.79 5485.4,4358.74 5495.4,4348.74 5510.4,4348.74 5520.01,4339.13 5520.01,4317.03
  Bottom Layer w6.25: J12.93@4922.83,5967.39 4922.83,5906.83 4677,5661 4677,4817 4934,4560 4934,4305 5085,4154 5374.9,4154 5520.01,4299.11 5520.01,4317.03
MCU_GPIO126: J12.26 U1.U9 | length 3296.1
  Top Layer w6.25: v1(5469.93,4395.77) U1.U9@5485.68,4411.52
  Signal layer 3 w4: v1(5469.93,4395.77) 5469.93,4385.63 5485.4,4370.15 5485.4,4358.74 5495.4,4348.74 5510.4,4348.74 5520.01,4339.13 5520.01,4317.59
  Signal layer 3 w6.25: 5520.01,4317.59 5520.01,4273.99 5712,4082 6351,4082 v1(6352,4083)
  Signal Layer 4 w6.25: v1(5993,6079) 6358,5714 6358,4092.18 6352,4086.18 v1(6352,4083)
  Bottom Layer w6.25: v1(5993,6079) 5993.83,6079.83 J12.26@5993.83,6139.61
MCU_GPIO127: J12.3 U1.V9 | length 3221.9
  Top Layer w6.25: v1(5469.93,4364.27) U1.V9@5485.68,4380.02
  Signal layer 3 w4: v1@5469.93,4358.18 5485.4,4342.7 5485.4,4283.6
  Signal layer 3 w6.25: 5485.4,4283.6 5704,4065 6414,4065 v1(6455,4106)
  Bottom Layer w6.25: J12.3@6340.16,5967.39 6340.16,5909.84 6615,5635 6615,4266 v1(6455,4106)
MCU_GPIO128: J12.1 U1.W9 | length 3242.9
  Top Layer w6.25: v1(5469.93,4332.78) U1.W9@5485.68,4348.52
  Signal layer 3 w6.25: v1(5469.93,4332.78) 5469.93,4278.07 5698,4050 6429,4050 6483,4104 v1(6483,4105)
  Bottom Layer w6.25: J12.1@6371.65,5967.39 6371.65,5912.35 6635,5649 6635,4256 6484,4105 v1(6483,4105)
MCU_GPIO129: J12.19 U1.T10 | length 2642
  Top Layer w6.25: v1(5501.43,4427.27) U1.T10@5517.18,4443.01
  Bottom Layer w4: v1(5501.43,4427.27) 5522.4,4448.24 5522.4,4506.74 5549.4,4533.74 5577.4,4533.74 5605.4,4561.74 5605.4,4586.74 5646.4,4627.74 5827.89,4627.74
  Bottom Layer w6.25: 5827.89,4627.74 5835.15,4635 6410,4635 6484,4709 6484,5593 6261,5816 6177,5816 6088.19,5904.81 J12.19@6088.19,5967.39
MCU_GPIO130: J12.17 U1.U10 | length 2680.3
  Top Layer w6.25: v1(5501.43,4395.77) U1.U10@5517.18,4411.52
  Bottom Layer w4: v1(5501.43,4395.77) 5534.4,4428.74 5534.4,4501.74 5556.4,4523.74 5583.4,4523.74 5616.1,4556.43 5616.1,4579.43 5652.4,4615.74 5848.4,4615.74
  Bottom Layer w6.25: 5848.4,4615.74 6418.74,4615.74 6503,4700 6503,5605 6273,5835 6191,5835 6119.69,5906.31 J12.17@6119.69,5967.39
MCU_GPIO131: J12.15 U1.V10 | length 2728.2
  Top Layer w6.25: v1(5501.43,4364.27) U1.V10@5517.18,4380.02
  Bottom Layer w4: v1(5501.43,4364.27) 5546.4,4409.25 5546.4,4498.74 5560.4,4512.74 5590.4,4512.74 5628.4,4550.74 5628.4,4575.74 5657.67,4605 5831.87,4605
  Bottom Layer w6.25: 5831.87,4605 5837.87,4599 6431,4599 6522,4690 6522,5622 6292,5852 6211,5852 6151.18,5911.82 J12.15@6151.18,5967.39
MCU_GPIO132: J12.11 U1.W18 | length 2808.2
  Top Layer w6.25: U1.W18@5769.15,4348.52 v1(5784.89,4332.78)
  Bottom Layer w6.25: v1(5784.89,4332.78) 5784.89,4314.11 5936,4163 6445,4163 6575,4293 6575,5622 6308,5889 6245,5889 6214.17,5919.83 J12.11@6214.17,5967.39
MCU_GPIO133: U1.G18 U26.37 | length 1285.7
  Top Layer w6.25: U1.G18@5769.15,4726.48 v1(5784.89,4742.23) ; v1(6311,5428) 6311.53,5427.47 6364.34,5427.47 U26.37@6364.87,5426.94
  Signal layer 3 w4: v1(5784.89,4742.23) 5800.02,4727.1 5832.14,4727.1
  Signal layer 3 w6.25: 5832.14,4727.1 5844.03,4739 6182.18,4739 v1(6204,4717.18)
  Signal Layer 4 w6.25: v1(6204,4717.18) 6207.18,4717.18 6266.38,4776.38 6266.38,4831.62 6251,4847 6251,5144 6282,5175 6282,5399 v1(6311,5428)
MCU_GPIO134: J12.13 U1.V18 | length 2792.4
  Top Layer w6.25: U1.V18@5769.15,4380.02 v1(5784.89,4364.27)
  Bottom Layer w4: v1(5784.89,4364.27) 5801.01,4348.16 5801.01,4322.16
  Bottom Layer w6.25: 5801.01,4322.16 5937.17,4186 6436,4186 6557,4307 6557,5613 6300,5870 6226,5870 6182.68,5913.32 J12.13@6182.68,5967.39
MCU_GPIO135: J12.5 U1.U18 | length 2876.4
  Top Layer w6.25: U1.U18@5769.15,4411.52 v1(5784.89,4395.77)
  Bottom Layer w4: 5769.01,4317.93 5769.01,4379.88 v1(5784.89,4395.77)
  Bottom Layer w6.25: 5769.01,4317.93 5769.01,4305.99 5931,4144 6463,4144 6595,4276 6595,5631 6308.66,5917.34 J12.5@6308.66,5967.39
MCU_GPIO136: J12.4 U1.T17 | length 3139.9
  Top Layer w6.25: U1.T17@5737.65,4443.01 v1(5753.4,4427.27)
  Signal layer 3 w4: v1@5755.26,4425.4 5764.74,4425.4 5778.4,4411.74 5832.14,4411.74
  Signal layer 3 w6.25: 5832.14,4411.74 6671.74,4411.74 6687,4427 6753,4427 6885,4559 v1(6885,4603)
  Signal Layer 4 w4: v1(5753.4,4427.27) v1@5755.26,4425.4
  Signal Layer 4 w6.25: v1(6339,6076) 6467,5948 6661,5948 6885,5724 v1(6885,4603)
  Bottom Layer w6.25: v1(6339,6076) 6339.34,6076.34 J12.4@6339.34,6137.61
MCU_GPIO137: J12.8 U1.T18 | length 3039.1
  Top Layer w6.25: U1.T18@5769.15,4443.01 v1(5784.89,4427.27)
  Signal layer 3 w4: v1(5784.89,4427.27) 5800.73,4443.1 5834.29,4443.1
  Signal layer 3 w6.25: 5834.29,4443.1 6374.1,4443.1 6419,4488 6722,4488 6850,4616 v1(6850,4638)
  Signal Layer 4 w6.25: v1@6275.69,6080.31 v1(6277,6079) 6450,5906 6642,5906 6850,5698 v1(6850,4638)
  Bottom Layer w6.25: J12.8@6276.35,6137.61 6276.35,6079.65 v1(6277,6079)
MCU_GPIO138: J12.6 U1.T19 | length 3023.2
  Top Layer w6.25: U1.T19@5800.64,4443.01 v1(5816.39,4427.27)
  Signal layer 3 w6.25: v1(5816.39,4427.27) 6661.8,4427.27 6700.54,4466 6727,4466 6795.88,4534.88 6867,4606 v1(6867,4621)
  Signal Layer 4 w6.25: v1(6308,6078) 6458,5928 6651,5928 6867,5712 v1(6867,4621)
  Bottom Layer w6.25: J12.6@6307.84,6137.61 6307.84,6078.16 v1(6308,6078)
MCU_GPIO139: J12.18 U1.N19 | length 3001.3
  Top Layer w6.25: U1.N19@5800.64,4537.5 v1(5816.39,4521.75)
  Signal layer 3 w6.25: v1(5816.39,4521.75) 5900.75,4521.75 5946,4567 6753,4567 6795,4609 v1(6797,4609)
  Signal Layer 4 w6.25: v1(6120,6077) 6350,5847 6611,5847 6797,5661 v1(6797,4609)
  Bottom Layer w6.25: v1(6120,6077) 6120.83,6077.83 J12.18@6120.83,6137.61
MCU_GPIO140: J12.20 U1.M19 | length 2953
  Top Layer w6.25: U1.M19@5800.64,4569 v1(5816.39,4553.25)
  Signal layer 3 w6.25: v1@5816.78,4553.25 5881.25,4553.25 5935,4607 6740,4607 v1(6780,4647)
  Signal Layer 4 w6.25: v1(6089,6076) 6341,5824 6600,5824 6780,5644 v1(6780,4647)
  Bottom Layer w6.25: v1(6089,6076) 6089.34,6076.34 J12.20@6089.34,6137.61
MCU_GPIO141: J12.22 U1.M18 | length 2965.2
  Top Layer w6.25: U1.M18@5769.15,4569 v1(5784.89,4553.25)
  Signal layer 3 w4: v1(5784.89,4553.25) 5800.38,4568.74 5873.59,4568.74
  Signal layer 3 w6.25: 5873.59,4568.74 5927.86,4623 6725,4623 v1(6762,4660)
  Signal Layer 4 w6.25: v1(6058,6078) 6332,5804 6592,5804 6762,5634 v1(6762,4660)
  Bottom Layer w6.25: J12.22@6057.84,6137.61 6057.84,6078.16 v1(6058,6078)
MCU_GPIO142: J12.24 U1.L19 | length 2896.8
  Top Layer w6.25: U1.L19@5800.64,4600.49 v1(5816.39,4584.74)
  Signal layer 3 w6.25: v1(5816.39,4584.74) 5863.74,4584.74 5918,4639 6711,4639 v1(6738,4666)
  Signal Layer 4 w6.25: v1(6027,6079) 6322,5784 6583,5784 6738,5629 v1(6738,4666)
  Bottom Layer w6.25: J12.24@6026.35,6137.61 6026.35,6079.65 v1(6027,6079)
MCU_GPIO143: J12.23 U1.F18 | length 2000.2
  Top Layer w6.25: U1.F18@5769.15,4757.97 v1(5784.89,4773.72)
  Bottom Layer w4: v1(5784.89,4773.72) 5800.64,4757.97 5832.14,4757.97
  Bottom Layer w6.25: 5832.14,4757.97 5844.16,4770 5945,4770 5991,4816 6305,4816 6433,4944 6433,5593 6249,5777 6157,5777 6025.2,5908.8 J12.23@6025.2,5967.39
MCU_GPIO144: J12.45 U1.F17 | length 1296.1
  Top Layer w6.25: U1.F17@5737.65,4757.97 v1(5753.4,4773.72)
  Bottom Layer w4: 5674.4,4946.95 5674.4,4859.7 5682.01,4852.1 5697.01,4852.1 5706.01,4843.1 5706.01,4798.1 5715.01,4789.1 5735.01,4789.1 5750.39,4773.72 v1(5753.4,4773.72)
  Bottom Layer w6.25: 5674.4,4946.95 5707.01,4979.55 5707.01,5886.99 5678.74,5915.26 J12.45@5678.74,5967.39
MCU_GPIO145: J12.25 U1.E17 | length 1699.1
  Top Layer w6.25: U1.E17@5737.65,4789.47 v1(5753.4,4805.22)
  Bottom Layer w4: v1(5753.4,4805.22) 5769.21,4789.41 5827.64,4789.41
  Bottom Layer w6.25: 5827.64,4789.41 5873.23,4835 6049,4835 6220.06,5006.06 6220.06,5102.06 6291,5173 6291,5616 5993.7,5913.3 J12.25@5993.7,5967.39
MCU_GPIO146: J12.27 U1.D18 | length 1627.7
  Top Layer w6.25: U1.D18@5769.15,4820.97 v1(5784.89,4836.71)
  Bottom Layer w4: v1(5784.89,4836.71) 5800.5,4821.1 5825.64,4821.1
  Bottom Layer w6.25: 5825.64,4821.1 5856.54,4852 6027.9,4852 6190,5014.1 6190,5109 6270,5189 6270,5589.85 5962.2,5897.64 J12.27@5962.2,5967.39
MCU_GPIO147: J12.42 U1.D17 | length 2133.4
  Top Layer w6.25: U1.D17@5737.65,4820.97 v1(5753.4,4836.71)
  Signal layer 3 w4: v1(5753.4,4836.71) 5769.37,4820.74 5826.01,4820.74
  Signal layer 3 w6.25: 5826.01,4820.74 6202.26,4820.74 v1(6245.05,4777.95)
  Signal Layer 4 w6.25: v1(5742,6076) 6067,5751 6067,5694 6259,5502 6259,5179 6227,5147 6227,4797 v1@6246.61,4777.39
  Bottom Layer w6.25: v1(5742,6076) 5742.83,6076.83 J12.42@5742.83,6136.61
MCU_GPIO148: J12.47 U1.D14 | length 1179.3
  Top Layer w6.25: U1.D14@5643.16,4820.97 v1(5658.91,4836.71)
  Bottom Layer w4: 5643.01,4946.95 5643.01,4852.61 v1(5658.91,4836.71)
  Bottom Layer w6.25: 5643.01,4946.95 5669,4972.94 5669,5889.01 5647.24,5910.76 J12.47@5647.24,5967.39
MCU_GPIO149: J12.49 U1.A13 | length 1082
  Top Layer w6.25: U1.A13@5611.66,4915.45 v1(5627.41,4931.2)
  Bottom Layer w6.25: J12.49@5615.75,5967.39 5615.75,5914.25 5650.01,5879.99 5650.01,4982.1 5627.41,4959.51 v1(5627.41,4931.2)
MCU_GPIO150: J12.50 U1.B13 | length 1289.9
  Top Layer w6.25: U1.B13@5611.66,4883.96 v1(5627.41,4899.7)
  Signal Layer 4 w4: v1(5627.41,4899.7) 5629.12,4901.41 5629.12,4911.21 5643.01,4925.1 5643.01,4975.1
  Signal Layer 4 w6.25: v1@5613.5,6074.5 5658.01,6029.99 5658.01,5757.01 5658.01,4990.1 5643.01,4975.1
  Bottom Layer w6.25: v1(5615,6074) 5615.34,6074.34 J12.50@5615.34,6135.61
MCU_GPIO151: J12.48 U1.C13 | length 1358.8
  Top Layer w6.25: U1.C13@5611.66,4852.46 v1(5627.41,4868.21)
  Signal Layer 4 w4: v1(5627.41,4868.21) 5627.41,4868.51 5643.01,4884.1 5643.01,4908.1 5650.01,4915.1 5666.01,4915.1 5675.01,4924.1 5675.01,4946.95
  Signal Layer 4 w6.25: v1@5642.62,6076.38 5705,6014 5705,4976.94 5675.01,4946.95
  Bottom Layer w6.25: v1(5646,6075) 5646.83,6075.83 J12.48@5646.83,6135.61